# EAGLE board VibrationDrive1 (EAGLE 7.2.0)
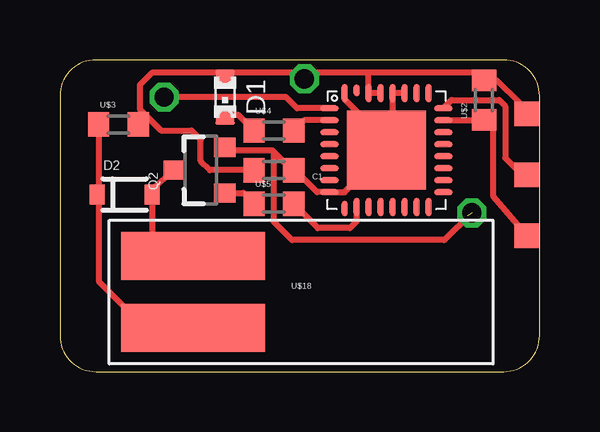
[diagram p0: board, top side]
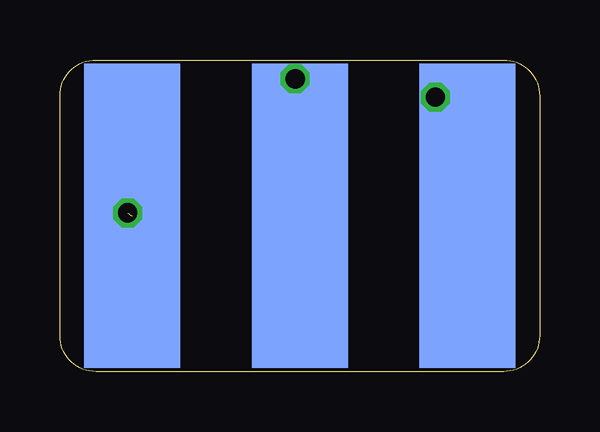
[diagram p1: board, bottom side, seen from below]

Size 20 x 13 mm. Coordinates in mm from the lower left corner, seen from the top.
Copper layers (1*16): Top 0.035mm / dielectric 1.5mm / Bottom 0.035mm
Design rules "Bilex DRU *": minimum track width 10mil, minimum drill 24mil, track to track 10mil, track to pad 10mil, pad to pad 10mil, via to via 10mil, smd to smd 10mil, copper to edge 1mil, drill to drill 8mil, minimum pad ring 10mil, minimum via ring 8mil, stop-mask expansion 4mil, vias tented up to drill 0mil, thermal gap 10mil

## Footprints (pad centres in the part's own frame; a part is rotated, then mirrored left to right if it is on the bottom)
603 = smd 0.889 x 1.016: 1 -0.826,0; 2 0.826,0
LED_0603 = smd 0.8 x 0.8: A 0,-0.75; C 0,0.75
SOD-323 = smd 0.63 x 0.83: A 1.15,0; C -1.15,0
SOT23-3 = smd 0.8 x 0.9: 1 -0.95,-1; 2 0.95,-1; 3 0,1.1
CARRIER_SMD2_3POL = smd 4 x 12.7 bottom: GND -6.985,0; RX/TX 6.985,0; VCC 0,0 | smd 1.016 x 1.016: RST -9.461,0.826; TST -9.461,-1.714; VCC'' -9.461,-4.255
QFN32 = smd 0.762 x 0.254: 1 -2.375,1.75; 2 -2.375,1.25; 3 -2.375,0.75; 4 -2.375,0.25; 5 -2.375,-0.25; 6 -2.375,-0.75; 7 -2.375,-1.25; 8 -2.375,-1.75; 17 2.375,-1.75; 18 2.375,-1.25; 19 2.375,-0.75; 20 2.375,-0.25; 21 2.375,0.25; 22 2.375,0.75; 23 2.375,1.25; 24 2.375,1.75 | smd 0.254 x 0.635: 9 -1.75,-2.438 | smd 0.254 x 0.762: 10 -1.25,-2.375; 11 -0.75,-2.375; 12 -0.25,-2.375; 13 0.25,-2.375; 14 0.75,-2.375; 15 1.25,-2.375; 16 1.75,-2.375; 25 1.75,2.375; 26 1.25,2.375; 27 0.75,2.375; 28 0.25,2.375; 29 -0.25,2.375; 30 -0.75,2.375; 32 -1.75,2.375 | smd 0.254 x 0.508: 31 -1.25,2.5 | smd 3.302 x 3.302: TP 0,0
VIBRATIONSMOTOR = smd 6 x 2: 1 -4.5,1.5; 2 -4.5,-1.5

## Placement (x,y rotation side)
C1  100n  [603]  8.92,8.4 0 top
D1  LED-0603  [LED_0603]  6.89,11.45 180 top
D2  250mA/100V  [SOD-323]  2.7,7.39 0 top
Q2  MMBT5088  [SOT23-3]  5.87,8.4 90 top
U$1  CARRIER_SMD2SMD2_3POL  [CARRIER_SMD2_3POL]  10,6.5 180 top
U$2  10k  [603]  17.68,11.32 90 top
U$3  100  [603]  2.44,10.31 0 top
U$4  100  [603]  8.92,10.05 0 top
U$5  10k  [603]  8.92,7.01 0 top
U$10  MSP430G2553  [QFN32]  13.62,9.24 0 top
U$18  PINHD_2VIBRATIONSMOTOR  [VIBRATIONSMOTOR]  10.06,3.32 0 top

## Library data of the parts
C1 U$1-U$5 U$10 U$18 = thar
D1 = we-opto
D2 = SparkFun-DiscreteSemi; PROD_ID: DIO-09646
Q2 = SparkFun-DiscreteSemi; PROD_ID: TRANS-11160

## Nets
GND: C1.2 Q2.2 U$1.GND U$10.8 U$10.27 U$10.28 U$10.32 U$10.TP
N$3: U$1.TST U$10.24
N$4: U$1.RST U$2.1 U$10.23
N$5: U$5.2 U$10.10
N$6: Q2.1 U$5.1
N$7: D2.A Q2.3 U$18.1
N$11: D2.C U$3.1 U$18.2
N$12: U$1.RX/TX U$10.1
N$13: U$4.2 U$10.2
N$14: D1.C U$4.1
VCC: C1.1 D1.A U$1.VCC U$1.VCC'' U$2.2 U$3.2 U$10.29 U$10.30

## Tracks (layer width: path | path; a pad name or v marks a point on that pad's centre or on a via)
GND  (via drill 0.8)  (1 unrouted)
  Top 0.254: U$10.27 U$10.28 13.87,9.88 | 13.51,9.93 13.9,10.2 14.01,9.93 | 13.51,9.93 13.56,8.65 U$10.TP 12.73,8.66 12.73,8.35 11.87,7.49 U$10.8 10.72,7.49 10.06,8.15 9.93,8.34 C1.2 9.68,8.4 8.92,9.16 | U$10.32 11.87,11.37 12.47,10.76 13.36,10.31 13.99,9.42 13.87,9.88 | 13.87,9.88 13.51,9.93 | v17.17,6.62 16.03,5.48 9.68,5.48 8.92,6.24 8.92,9.16 | Q2.2 6.87,9.22 8.86,9.22 8.92,9.16
  Bottom 0.254: 18,6.5 18,2.11 v17.17,6.62
N$3
  Top 0.254: U$1.TST 19.27,8.21 18.57,8.91 18.57,11.07 18.32,11.32 16.33,11.32 U$10.24
N$4
  Top 0.254: U$10.23 16,10.5 U$2.1 17.74,10.43 18.06,10.43 18.06,7.33 U$1.RST
N$5
  Top 0.254: U$10.10 12.37,6.26 12.09,5.99 10.76,5.99 U$5.2
N$6
  Top 0.254: Q2.1 7.65,7.45 U$5.1
N$7
  Top 0.254: U$18.1 5.54,4.85 3.96,4.85 3.84,4.97 D2.A 3.84,7.6 Q2.3
N$11
  Top 0.254: U$3.1 1.62,7.46 | 1.62,7.46 D2.C | 1.62,7.46 1.62,3.77 3.46,1.92 5.46,1.92 U$18.2
N$12  (via drill 0.8)
  Top 0.254: U$10.1 9.89,10.99 9.43,11.45 v4.35,11.45
  Bottom 0.254: U$1.RX/TX 3.01,10.12 v4.35,11.45
N$13
  Top 0.254: U$10.2 10.18,10.49 U$4.2
N$14
  Top 0.254: U$4.1 7.45,10.7 D1.C
VCC  (via drill 0.8)
  Top 0.254: U$10.29 U$10.30 12.87,12.45 12.86,12.47 | 12.86,12.47 10.06,12.47 | 12.86,12.47 17.49,12.47 U$2.2 17.94,12.4 19.46,10.94 U$1.VCC'' | v10.19,12.21 10.19,12.34 10.06,12.47 | 10.06,12.47 6.89,12.47 | 6.89,12.47 3.84,12.47 3.33,11.96 3.33,10.94 3.71,10.56 | 3.71,10.56 4.22,10.05 5.49,10.05 5.87,9.67 5.87,8.78 6.25,8.4 8.41,8.4 8.35,8.47 C1.1 | U$3.2 3.46,10.31 3.71,10.56 | D1.A 6.89,12.47
  Bottom 0.254: U$1.VCC 10,12.02 v10.19,12.21